# Altium PCB PCB_OSHW_BiDi_SDI_Fiber_Converter_2024-11-17.pcbdoc
Units mil, origin at the board's own origin, x right, y up, seen from the top; angles counter-clockwise.
Board outline 6239.76 x 2995 mil, 2 copper layers (Top Layer, Bottom Layer); 70 components, 44 nets, 190 pads, 66 vias.
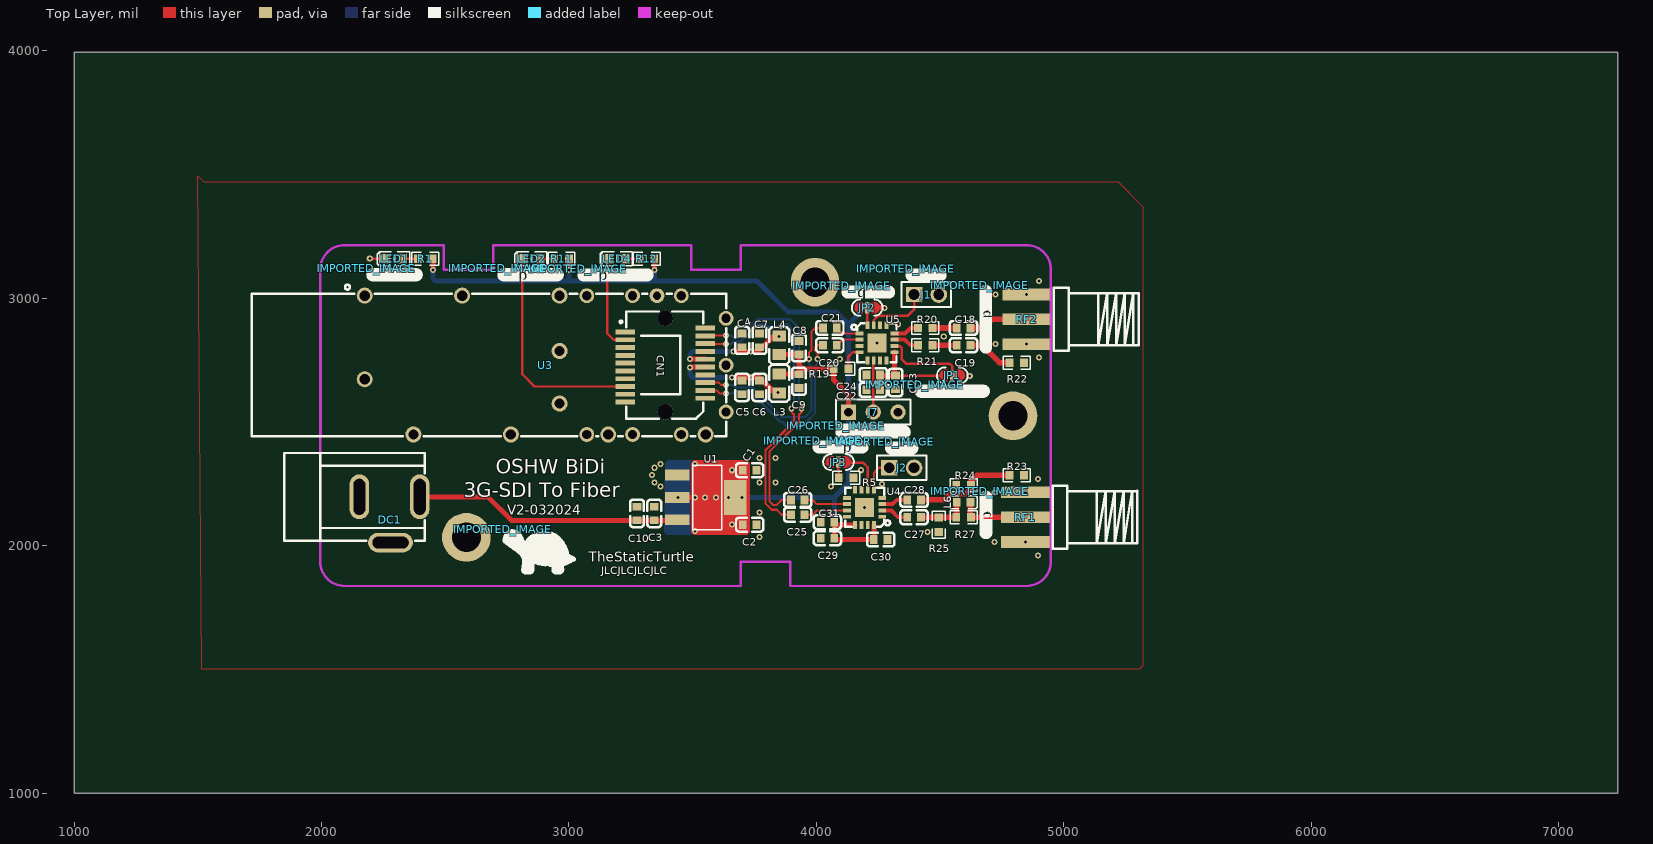
[diagram p0: Top Layer view]
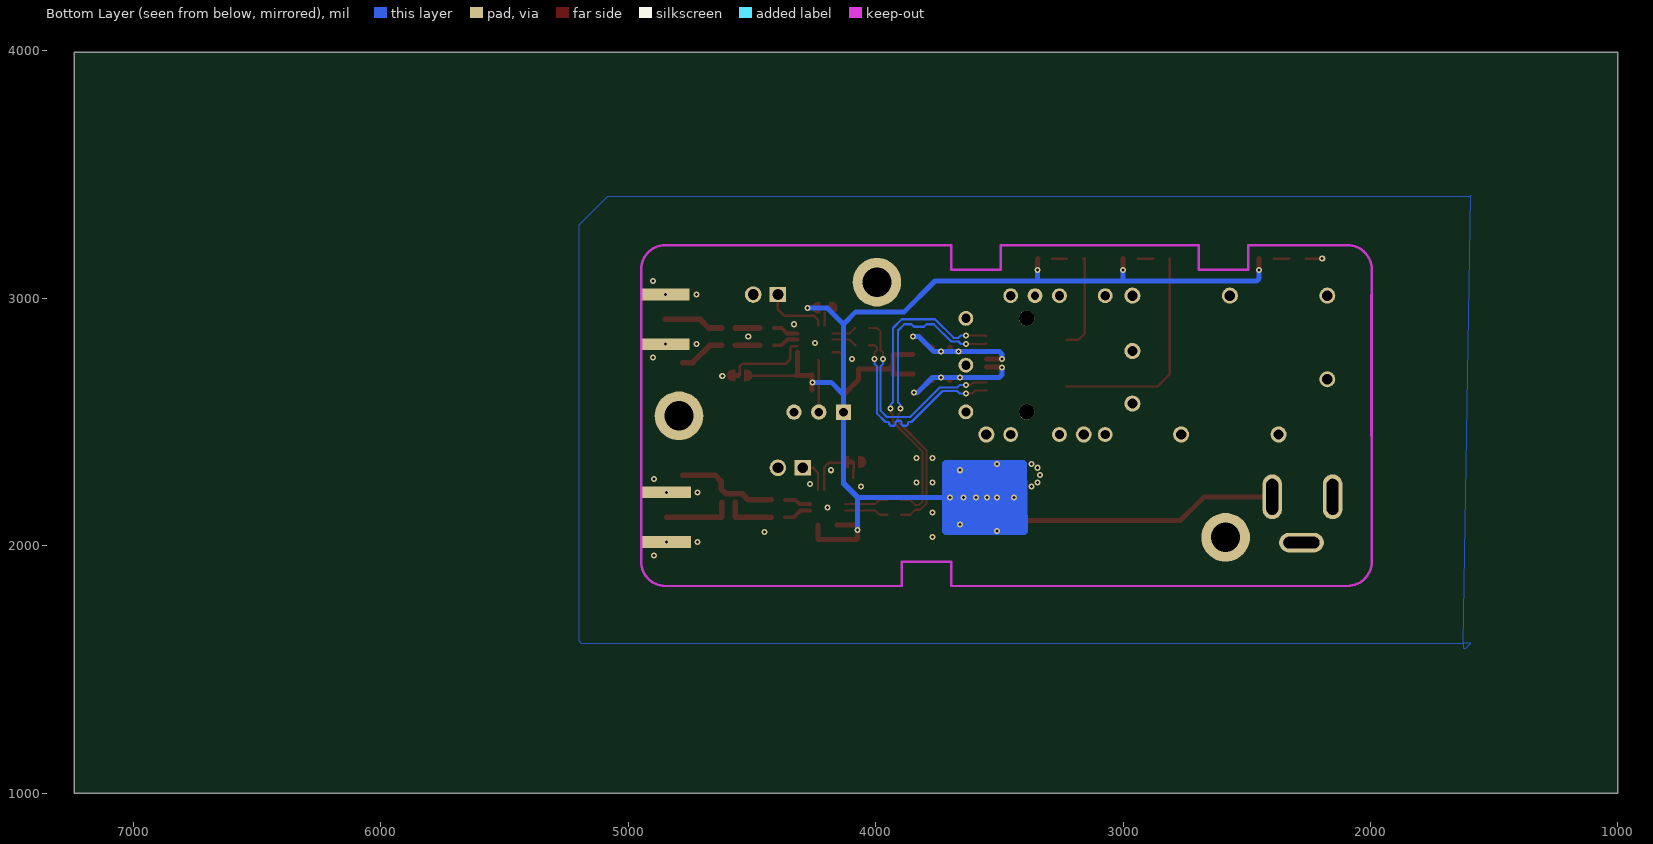
[diagram p1: Bottom Layer view, seen from below]

## Layer stack, top to bottom
Top Layer: signal copper (thickness not stored)
Dielectric: dielectric 12.6, FR-4, Dk 4.8
Bottom Layer: signal copper (thickness not stored)

## Board outline
7239.76,1000 1000,1000 1000,3995 7239.76,3995

## Components (designator, comment, footprint, x,y, rotation, side; value= is the part's Value field where it differs from the comment)
C1 "10u" C0603 3730,2305 r180 top
C2 "100n" C0603 3730,2085 r180 top
C3 "100n" C0603 3345,2130 r270 top
C4 "10u" C0603 3700,2830 r270 top
C5 "100n" C0603 3700,2640 r90 top
C6 "10u" C0603 3770,2640 r90 top
C7 "100n" C0603 3770,2830 r270 top
C8 "100n" C0603 3930,2800 r270 top
C9 "10u" C0603 3930,2665 r90 top
C10 "10u" C0603 3275,2130 r270 top
C18 "100n" C0603 4595,2880 r0 top
C19 "100n" C0603 4595,2810 r0 top
C20 "100n" C0603 4055,2810 r0 top
C21 "100n" C0603 4055,2880 r0 top
C22 "10u" C0603 4230,2630 r0 top
C23 "10n" C0603 4320,2660 r90 top
C24 "100n" C0603 4230,2690 r0 top
C25 "4.7u" C0603 3925,2125 r0 top
C26 "4.7u" C0603 3925,2185 r0 top
C27 "1u" C0603 4395,2115 r0 top
C28 "1u" C0603 4395,2185 r0 top
C29 "10n" C0603 4045,2030 r0 top
C30 "10n" C0603 4260,2025 r180 top
C31 "10u" C0603 4045,2095 r0 top
CN1 "HC-SFP-20P" CONN-SMD_20P-P0.80_HCTL_HC-SFP-20P 3390,2730 r270 top
DC1 "DC005-2.0MM" DC-IN-TH_DC005 2275,2105 r0 top
IMPORTED_IMAGE "IMPORTED_IMAGE" IMPORTED_IMAGE 4661.08,3052.84 r0 top
IMPORTED_IMAGE "IMPORTED_IMAGE" IMPORTED_IMAGE 4078.08,2485 r0 top
IMPORTED_IMAGE "IMPORTED_IMAGE" IMPORTED_IMAGE 4398.08,2650 r0 top
IMPORTED_IMAGE "IMPORTED_IMAGE" IMPORTED_IMAGE 2181.79,3120.64 r0 top
IMPORTED_IMAGE "IMPORTED_IMAGE" IMPORTED_IMAGE 2711.46,3120.64 r0 top
IMPORTED_IMAGE "IMPORTED_IMAGE" IMPORTED_IMAGE 3035.18,3120 r0 top
IMPORTED_IMAGE "IMPORTED_IMAGE" IMPORTED_IMAGE 4660,2220.64 r0 top
IMPORTED_IMAGE "IMPORTED_IMAGE" IMPORTED_IMAGE 4102.58,3050.64 r0 top
IMPORTED_IMAGE "IMPORTED_IMAGE" IMPORTED_IMAGE 4278.39,2420.64 r0 top
IMPORTED_IMAGE "IMPORTED_IMAGE" IMPORTED_IMAGE 4360.92,3120 r0 top
IMPORTED_IMAGE "IMPORTED_IMAGE" IMPORTED_IMAGE 3985.42,2425 r0 top
IMPORTED_IMAGE "IMPORTED_IMAGE" IMPORTED_IMAGE 2732.36,2065.54 r0 top
J1 "LFout" HDR-M-2.54_1X2 4445,3015 r0 top
J2 "LFin" HDR-M-2.54_1X2 4345,2315 r0 top
J7 "OUT_EN" HDR-M-2.54_1X3 4230,2540 r0 top
JP1 "SOLDER BRIDGE 3P Bridged" SOLDER_BRIDGE_3P_BRIDGED 4550,2690 r270 top
JP2 "SOLDER BRIDGE 3P Bridged" SOLDER_BRIDGE_3P_BRIDGED 4205,2960 r90 top
JP3 "SOLDER BRIDGE 3P Bridged" SOLDER_BRIDGE_3P_BRIDGED 4090,2340 r270 top
L3 "100Ω" L0805 3850,2655 r270 top
L4 "100Ω" L0805 3850,2810 r90 top
L6 "2.7n" L0603 4595,2175 r0 top
LED1 "LED_POW" LED0603_RED 2295,3160 r180 top
LED2 "LED_LOS" LED0603_RED 2850,3160 r180 top
LED4 "LED_LOS" LED0603_RED 3195,3160 r180 top
R1 "1k" R0603 2420,3160 r180 top
R5 "1k" R0603 4120,2275 r180 top
R11 "1k" R0603 2970,3160 r180 top
R12 "1k" R0603 3315,3160 r180 top
R19 "750" R0603 4100,2715 r0 top
R20 "25" R0603 4440,2880 r0 top
R21 "25" R0603 4440,2810 r0 top
R22 "75" R0603 4810,2740 r0 top
R23 "75" R0603 4810,2285 r0 top
R24 "75" R0603 4595,2245 r0 top
R25 "75" R0603 4495,2085 r90 top
R27 "75" R0603 4595,2115 r0 top
RF1 "SDI_IN" SMA-SMD_BWSMA-KE-P001 4845,2115 r180 top
RF2 "SDI_OUT" SMA-SMD_BWSMA-KE-P001 4850,2915 r180 top
U1 "AMS1117-3.3" SOT-223-3_L6.5-W3.4-P2.30-LS7.0-BR 3555,2195 r180 top
U3 "HC-SFP-01L" TH_HC-SFP-01L 2905,2730 r0 top
U4 "EQCO30R5" QFN16G-0.65-4X4MM 4195,2155 r180 top
U5 "EQCO30T5" QFN16G-0.65-4X4MM 4245,2820 r0 top
? "" ? 5292.11,2515.01 r0 top
? "" ? 5396.88,2527.5 r0 top

## Footprints (in the part's own frame and the unit in brackets; to place one, negate y for a bottom-side part, rotate by r counter-clockwise, add the part's x,y. Pads: shape width x height; smd on the part's side, far side on the other; paste and mask are expansions set on the pad)
C0603 [mm]
  rect 0.8x0.9 smd paste+0 mask+0.051: 1(-0.7,0) 2(0.7,0)
  silkscreen extent -1.41,-0.71 1.39,0.72
CONN-SMD_20P-P0.80_HCTL_HC-SFP-20P [mm]
  rect 0.5x2 smd paste+0 mask+0.051: 1(-3.4,-4.1) 2(-2.6,-4.1) 3(-1.8,-4.1) 4(-1,-4.1) 5(-0.2,-4.1) 6(0.6,-4.1) 7(1.4,-4.1) 8(2.2,-4.1) 9(3,-4.1) 10(3.8,-4.1) 11(3.4,4.1) 12(2.6,4.1) 13(1.8,4.1) 14(1,4.1) 15(0.2,4.1) 16(-0.6,4.1) 17(-1.4,4.1) 18(-2.2,4.1) 19(-3,4.1) 20(-3.8,4.1)
  round 1.6 hole 1.6 unplated paste+0: ""(-4.8,0) ""(4.8,0)
  silkscreen extent -5.5,-4.7 5.5,3.9
DC-IN-TH_DC005 [mm]
  oval 2x4.6 hole 1.2 slot 3.7 at 90 deg paste+0 mask+0.051: 1(3.1,2.35) 2(-3.1,2.35)
  oval 4.6x2 hole 1.2 slot 3.7 at 0 deg paste+0 mask+0.051: 3(0.1,-2.35)
  silkscreen extent -10.8,-2.15 3.6,6.85
HDR-M-2.54_1X2 [mm]
  rect 1.7x1.575 hole 1.1 paste+0 mask+0.051: 1(-1.27,0)
  round 1.7 hole 1.1 paste+0 mask+0.051: 2(1.27,0)
  silkscreen extent -2.54,-1.27 2.54,1.27
HDR-M-2.54_1X3 [mil]
  rect 62x62 hole 35 paste+0 mask+2: 1(-100,0)
  round 62 hole 35 paste+0 mask+2: 2(0,0) 3(100,0)
  silkscreen extent -150,-50 150,50
IMPORTED_IMAGE [mil]
  silkscreen extent 0,-276 48,0
L0603 [mm]
  rect 0.8x0.864 smd paste-100 mask+0.051: 1(-0.7,0) 2(0.7,0)
  silkscreen extent -1.42,-0.65 1.41,0.67
L0805 [mil]
  rect 44.59x54.21 smd paste-3937.01 mask+2: 1(-38.05,0) 2(38.04,0)
  silkscreen extent -77,-40 73,40
LED0603_RED [mm]
  rect 0.9x1 smd paste+0 mask+0.051: 1(-0.85,0) 2(0.85,0)
  silkscreen extent -1.54,-0.73 1.75,0.73
QFN16G-0.65-4X4MM [mil]
  rect 31.5x15.7 smd paste+0 mask+2: 1(-71,38) 2(-71,13) 3(-71,-13) 4(-71,-38) 9(71,-38) 10(71,-13) 11(71,13) 12(71,38)
  rect 15.7x31.5 smd paste+0 mask+2: 5(-38,-71) 6(-13,-71) 7(13,-71) 8(38,-71) 13(38,71) 14(13,71) 15(-13,71) 16(-38,71)
  rect 76.8x76.8 smd paste+0 mask+2: 17(0,0)
  silkscreen extent -103,-79 79,79
R0603 [mil]
  rect 31.75x34.02 smd paste-3937.01 mask+2: 1(-29.66,0) 2(29.66,0)
  silkscreen extent -55,-26 55,26
SMA-SMD_BWSMA-KE-P001 [mm]
  rect 5x1.2 smd paste+0 mask+0.051: 1(0,2.55) 2(0,-2.55) 5(0,0)
  rect 5x1.2 smd far side paste+0 mask+0.051: 3(0,-2.55) 4(0,2.55)
  silkscreen extent -11.5,-3.25 -2.79,3.25
SOLDER_BRIDGE_3P_BRIDGED [mm]
  rect 1.15x0.5 smd paste+0 mask+0.051: 2(0.049,-0.015)
  Top Layer region: 0.3,0 0.3,0.6 -0.2,0.6 -0.2,0
  Top Layer region: -0.523,0.461 0.62,0.461 0.62,0.715 0.618,0.751 0.613,0.786 0.606,0.821 0.597,0.855 0.586,0.889 0.573,0.922 0.559,0.954 0.542,0.985 0.523,1.015 0.503,1.045 0.481,1.072 0.458,1.099 0.433,1.124 0.406,1.148 0.378,1.169 0.349,1.19 0.319,1.208 0.288,1.225 0.255,1.24 0.222,1.253 0.189,1.263 0.154,1.272 0.119,1.279 0.084,1.284 0.049,1.287 0.014,1.284 -0.022,1.279 -0.056,1.272 -0.091,1.263 -0.124,1.253 -0.158,1.24 -0.19,1.225 -0.221,1.208 -0.251,1.19 -0.28,1.169 -0.308,1.148 -0.335,1.124 -0.36,1.099 -0.383,1.072 -0.405,1.045 -0.426,1.015 -0.444,0.985 -0.461,0.954 -0.476,0.922 -0.488,0.889 -0.499,0.855 -0.508,0.821 -0.515,0.786 -0.52,0.751 -0.523,0.715
  Top Layer region: 0.62,-0.491 -0.523,-0.491 -0.523,-0.745 -0.52,-0.781 -0.515,-0.816 -0.508,-0.851 -0.499,-0.885 -0.488,-0.919 -0.476,-0.952 -0.461,-0.984 -0.444,-1.015 -0.426,-1.045 -0.405,-1.075 -0.383,-1.102 -0.36,-1.129 -0.335,-1.154 -0.308,-1.178 -0.28,-1.2 -0.251,-1.22 -0.221,-1.238 -0.19,-1.255 -0.158,-1.27 -0.124,-1.283 -0.091,-1.294 -0.056,-1.302 -0.022,-1.309 0.014,-1.314 0.049,-1.317 0.084,-1.314 0.119,-1.309 0.154,-1.302 0.189,-1.294 0.222,-1.283 0.255,-1.27 0.288,-1.255 0.319,-1.238 0.349,-1.22 0.378,-1.2 0.406,-1.178 0.433,-1.154 0.458,-1.129 0.481,-1.102 0.503,-1.075 0.523,-1.045 0.542,-1.015 0.559,-0.984 0.573,-0.952 0.586,-0.919 0.597,-0.885 0.606,-0.851 0.613,-0.816 0.618,-0.781 0.62,-0.745
  silkscreen extent -0.78,-1.59 0.87,1.57
SOT-223-3_L6.5-W3.4-P2.30-LS7.0-BR [mm]
  rect 2.5x1.1 smd paste+0 mask+0.051: 1(2.97,-2.3) 2(2.97,0) 3(2.97,2.3)
  rect 2.34x3.6 smd paste+0 mask+0.051: 4(-2.97,0)
  silkscreen extent -1.57,-3.33 1.37,3.33
TH_HC-SFP-01L [mm]
  round 1.65 hole 1.05 paste+0 mask+0.05: 1(-18.55,7.125) 2(-8.55,7.125) 3(1.45,7.125) 11(16.45,-7.125) 14(6.45,-7.125) 16(-3.55,-7.125) 17(-13.55,-7.125) 18(-18.55,-1.455) 19(1.45,-3.955) 20(1.45,1.445)
  round 1.524 hole 0.95 paste+0 mask+0.05: 4(4.25,7.125) 5(8.95,7.125) 7(13.95,7.125) 8(18.55,4.795) 9(18.55,-0.005) 10(18.55,-4.805) 12(13.95,-7.125) 13(8.95,-7.125) 15(4.25,-7.125)
  round 1.524 hole 0.85 paste+0 mask+0.05: 6(11.45,7.125)
  Keep-Out Layer lines w0.254: -23.05,-7.239 -23.05,7.239
  silkscreen extent -30.15,-7.3 18.55,8.25
? [mil]

## Free pads (board coordinates)
  round 196.85 hole 118.11 paste+0 mask+2: 1(2585.55,2033.9) 1(3995,3065) 1(4795,2525)

## Via types
v1: diameter 24.41, hole 12.2, Top Layer to Bottom Layer, tented both sides, 64 vias
v2: diameter 24, hole 12, Top Layer to Bottom Layer, tented both sides, 2 vias

## Nets (pads, with @x,y where several pads share a name; then routed paths per layer and width w, separated by ;. In a path a pad name is that pad's centre, name@x,y a point inside that pad or via, vN(x,y) a via of type N, cw(c..) or ccw(c..) an arc to the next point about the centre after c; other vN are vias at no path point)
+3.3V: C1.2 C2.2 C8.2 C9.2 C22.2 C23.2 C24.2 C29.2 C30.2 C31.2 J7.1 L3.1 L4.1 R1.1 R11.1 R12.1 R19.1 U1.2 U1.4 U4.13 U4.16 U5.9 | length 6687.5
  Top Layer w10: C23.2 4513.89,2687.56 4514.41,2688.08
  Top Layer w20.16: R1.1 2449.66,3115.34 v1(2450,3115) ; R11.1 2999.66,3115.34 v1(3000,3115) ; R12.1 3345,3159.66 v1(3345,3115) ; v1(3440,2195) v1(3509.58,2195) v1(3550,2195) v1(3595,2195) v1(3645,2195) ; C2.2 3671.93,2115.51 U1.4 3671.93,2274.49 C1.2 ; L3.1 3929.52,2693.04 C9.2 C8.2 3929.52,2771.96 L4.1 ; C8.2 3930,2730 3945,2715 4070,2715 4070,2670 4130,2610 J7.1 ; C31.2 C29.2 4077.56,2025 C30.2 4233,2025.56 U4.16 ; C29.2 4072.6,2084 U4.13 ; 4240.59,2961.92 4273.08,2961.92 v1(4275,2960) ; C22.2 C24.2 4260,2687.56 C23.2 4316,2691.56 U5.9
  Bottom Layer w20.16: v1(2450,3115) 2450,3080 2460,3070 3000,3070 ; v1(3345,3115) 3345,3070 ; v1(3440,2195) v1(3645,2195) v1(3700,2195) 3735,2195 4070,2195 4130,2255 ; v1(4255,2660) 4180,2660 4130,2610 ; v1(4275,2960) 4195,2960 4130,2895 ; 3000,3070 v1(3000,3115) 3000,3070 ; 3000,3070 3345,3070 ; 3345,3070 3760,3070 3885,2945 4080,2945 4130,2895 ; 4130,2255 J7.1 4130,2250 4072.6,2192.6 v1(4072.56,2063.78) 4072.6,2197.6 4130,2255 ; 4130,2255 4130,2610 ; 4130,2610 4130,2895
  other v1: 3510,2060 3660,2085 3660,2305 3510,2330
+5V: C3.2 C10.2 DC1.1 U1.3 | length 1081.3
  Top Layer w20.16: DC1.1 2672.49,2197.51 2767.56,2102.44 C10.2 3436.07,2102.44 U1.3@3438.08,2104.45
GND: C1.1 C2.1 C3.1 C4.1 C5.1 C6.1 C7.1 C8.1 C9.1 C10.1 C22.1 C23.1 C24.1 C29.1 C30.1 C31.1 CN1.1 CN1.10 CN1.11 CN1.14 CN1.17 CN1.20 DC1.2 DC1.3 J1.2 J2.2 J7.3 LED1.2 pad.1 R5.1 R22.2 R23.2 R24.1 R25.1 RF1.1 RF1.2 RF1.3 RF1.4 RF2.1 RF2.2 RF2.3 RF2.4 U1.1 U3.1 U3.2 U3.3 U3.4 U3.5 U3.6 U3.7 U3.8 U3.9 U3.10 U3.11 U3.12 U3.13 U3.14 U3.15 U3.16 U3.17 U3.18 U3.19 U3.20 U4.1 U4.4 U4.9 U4.12 U4.17 U5.3 U5.17 | length 66.5
  Top Layer w10: v1(2195,3160) LED1.2
  other v1: 4895,1960 4720,2015 4845,2014.61 3770,2035 4450,2055 3770,2135 4195,2155 4720,2215 4845,2215.4 3370,2240 4060,2240 4265,2250 3345,2255 3770,2255 3835,2255 4895,2269.99 3335,2285 4180,2305 3345,2315 3370,2330 3770,2355 3835,2355 4620,2685 4095,2755 4900,2760 4725,2815 4850,2814.61 4245,2820 4515,2845 4330,2895 4725,3015 4850,3015.4 4900,3069.99
JP3_2: JP3.2 R5.2 | length 63.1
  Top Layer w10: JP3.2 R5.2@4090,2275
LED4_1: LED4.1 R12.2 | length 56.9
  Top Layer w10: LED4.1 R12.2
LFIN: J2.1 U4.5 | length 139.3
  Top Layer w10: U4.5 4233,2295 4253,2315 J2.1
LFOUT: J1.1 U5.15 | length 261.8
  Top Layer w10: U5.15 4232,2912 4248.5,2928.5 4368.5,2928.5 4395,2955 J1.1
OUT_EQDIS: JP2.2 U5.16 | length 50.6
  Top Layer w10: JP2.2@4205.59,2941.04 4205.59,2892.41 U5.16
OUT_SD_HD: JP1.2 U5.10 | length 331
  Top Layer w10: U5.10 4338,2807 4345,2800 4345,2755 4365,2735 4540,2735 4549.4,2725.6 JP1.2
R1_2: LED1.1 R1.2 | length 61.9
  Top Layer w10: LED1.1 R1.2
R11_2: LED2.1 R11.2 | length 61.9
  Top Layer w10: LED2.1@2878.47,3160 R11.2
RF1_5: L6.2 R27.2 RF1.5 | length 281.2
  Top Layer w22.84: L6.2 4622.56,2117.11 R27.2 ; R27.2 RF1.5
S$29966: 
SDI_IN_N: C28.2 R23.1 R24.2 | length 416.7
  Top Layer w22.84: C28.2 4515,2185 4540,2210 4605,2210 4624.7,2229.7 R24.2 4624.7,2259.7 4650,2285 R23.1
SDI_IN_P: C27.2 L6.1 R25.2 R27.1 | length 203.6
  Top Layer w22.84: C27.2 R25.2 R27.1 ; R27.1 4567.44,2117.11 L6.1
SDI_INA_N: C28.1 U4.3 | length 108.5
  Top Layer w15.75: U4.3 4308,2168 4325,2185 C28.1
SDI_INA_P: C27.1 U4.2 | length 112.6
  Top Layer w15.75: U4.2 4303,2142 4330,2115 C27.1
SDI_OUT_N: C19.2 R22.1 | length 186.8
  Top Layer w22.84: C19.2 4670,2810 4740,2740 R22.1
SDI_OUT_P: C18.2 RF2.5 | length 241.9
  Top Layer w22.84: C18.2 4675,2880 4710.01,2915.01 RF2.5
SDI_OUTA_N: R21.1 U5.11 | length 103.8
  Top Layer w15.75: U5.11 4357,2833 4380,2810 R21.1
SDI_OUTA_P: R20.1 U5.12 | length 103.5
  Top Layer w15.75: U5.12 4358,2858 4380,2880 R20.1
SDI_OUTB_N: C19.1 R21.2 | length 97.8
  Top Layer w22.84: R21.2 C19.1
SDI_OUTB_P: C18.1 R20.2 | length 97.8
  Top Layer w22.84: R20.2 C18.1
SFP_IN_N: C26.2 U4.10 | length 178.4
  Top Layer w8.66: C26.2 3985,2185 4002,2168 U4.10
SFP_IN_P: C25.2 U4.11 | length 178.5
  Top Layer w8.66: C25.2 3985,2125 4002,2142 U4.11
SFP_MOD_DEF0: CN1.6
SFP_OUT_N: C20.2 U5.2 | length 101
  Top Layer w8.66: C20.2 4105.56,2833 U5.2
SFP_OUT_P: C21.2 U5.1 | length 100.6
  Top Layer w8.66: C21.2 4104.56,2858 U5.1
SFP_RATE_SELECT0: CN1.7
SFP_RATE_SELECT1: CN1.9
SFP_RD+: C21.1 CN1.13 | length 878.5
  Top Layer w8.66: CN1.13 3605.9,2659.1 3615,2650 v1(3635,2650) ; v1(3970,2755) 3970,2780 3980,2790 3980,2865 3995,2880 C21.1
  Bottom Layer w8.66: v1(3635,2650) 3660,2650 3670,2640 3740,2640 3860,2520 3955,2520 3980,2545 3980,2725 3970,2735 v1(3970,2755)
SFP_RD-: C20.1 CN1.12 | length 875.7
  Top Layer w8.66: CN1.12 3597.4,2627.6 3610,2615 v1(3635,2615) ; v1(4005,2755) 4005,2780 3995,2790 3995,2800 4005,2810 C20.1
  Bottom Layer w8.66: v1(3635,2615) 3660,2615 3670,2625 3730,2625 3855,2500 3865,2500 3870,2495 3870,2490 3875,2485 3890,2485 3895,2490 3895,2500 3900,2505 3915,2505 3920,2500 3920,2490 3925,2485 3940,2485 3945,2490 3945,2495 3950,2500 3960,2500 3995,2535 3995,2725 4005,2735 v1(4005,2755)
SFP_RX_LOS: CN1.8 LED2.2 | length 904.3
  Top Layer w10: LED2.2@2811.54,3160 2811.54,2693.46 2861.61,2643.39 CN1.8
SFP_SCL: CN1.5
SFP_SDA: CN1.4
SFP_TD+: C25.1 CN1.18 | length 1288
  Top Layer w8.66: CN1.18 3553.03,2815 v1(3635,2815) ; C25.1 3860,2125 3840,2145 3820,2145 3795,2170 3795,2387 3910,2502 3910,2530 3900,2540 v2(3900,2555)
  Bottom Layer w8.66: v1(3635,2815) 3655,2815 3665,2825 3695,2825 3765,2895 3795,2895 3805,2885 3845,2885 3855,2895 3885,2895 3910,2870 3910,2580 3900,2570 v2(3900,2555)
SFP_TD-: C26.1 CN1.19 | length 1289
  Top Layer w8.66: CN1.19 3556.41,2848.11 3558.3,2850 v1(3635,2850) ; C26.1 3860,2185 3840,2165 3825,2165 3810,2180 3810,2380 3930,2500 3930,2530 3940,2540 v2(3940,2555)
  Bottom Layer w8.66: v1(3635,2850) 3655,2850 3665,2840 3685,2840 3760,2915 3895,2915 3930,2880 3930,2580 3940,2570 v2(3940,2555)
SFP_TX_DISABLE: CN1.3
SFP_TX_FAULT: CN1.2 LED4.2 | length 392.6
  Top Layer w10: LED4.2 3155,3160 3155,2858.1 3180.7,2832.4 CN1.2
U4_6: U4.6 | length 182.9
  Top Layer w10: 4124.7,2337.8 4127.5,2335 4190,2335 4208,2317 U4.6
U5_4: R19.2 U5.4 | length 101.2
  Top Layer w10: R19.2 4129.66,2764.66 4147,2782 U5.4
U5_6: J7.2 U5.6 | length 209.8
  Top Layer w10: J7.2 4230,2747 U5.6
VCC_SFPR: C5.2 C6.2 CN1.15 L3.2 | length 833.5
  Top Layer w20.16: v1(3490,2720) 3492.13,2722.13 CN1.15 ; v1(3660,2680) v1(3735,2680) ; C5.2 3712.44,2680 v1(3735,2680) ; C6.2 3782.44,2667.56 3830,2620 v1(3845,2620) 3848.04,2616.96 L3.2 ; L3.2 3833,2617 3770,2680 v1(3735,2680)
  Bottom Layer w20.16: v1(3490,2720) 3490,2690 3500,2680 v1(3660,2680) 3770,2680 3830,2620 v1(3845,2620)
VCC_SFPT: C4.2 C7.2 CN1.16 L4.2 | length 807.4
  Top Layer w20.16: v1(3490,2755) 3491.38,2753.62 3505,2753.62 CN1.16 ; v1(3665,2785) 3695,2785 C4.2@3700,2790 ; C7.2 3782.44,2802.44 L4.2@3825,2845 ; C4.2@3700,2790 3705,2785 v1(3735,2785) 3765,2785 L4.2@3825,2845 ; C4.2@3700,2790 C4.2 C4.2@3700,2790 ; L4.2@3825,2845 v1(3850,2845) L4.2@3825,2845
  Bottom Layer w20.16: v1(3490,2755) 3490,2775 3500,2785 3765,2785 3825,2845 v1(3850,2845)
pads on no net: CN1. U4.7 U4.8 U4.14 U4.15 U5.5 U5.7 U5.8 U5.13 U5.14

## Polygon pours and split planes (outlines as drawn)
GND on Bottom Layer (solid): 1624.67,1605 1625,1585 1615,1585 1595,1605 1624.67,1605
GND on Bottom Layer (solid): 1624.67,1605 1595,3415 1600,3410 5085,3410 5200,3295 5200,1615 5190,1605 1624.67,1605
GND on Top Layer (solid): 1500,3495 1525,3470 5220,3470 5320,3370 5320,1515 5305,1500 1515,1500

## Keep-outs
Keep-Out Layer:
  lines w10: 1995,1935.47 ccw(c2093.43,1935.47) 2093.43,1837.05 ; 1995,3116.57 cw(c2093.43,3116.57) 2093.43,3215 ; 4849.32,1837.05 ccw(c4849.32,1935.47) 4947.75,1935.47 ; 4849.32,3215 cw(c4849.32,3116.57) 4947.75,3116.57

## Other copper
Top Layer:
  region net +3.3V: 3730,2335 3720,2345 3505,2345 3495,2335 3495,2055 3505,2045 3720,2045 3730,2055
Bottom Layer:
  region net +3.3V: 3730,2335 3720,2345 3400,2345 3390,2335 3385,2055 3395,2045 3720,2045 3730,2055

## Silkscreen, mask and mechanical layers (free items; w line width, h text height)
Top Overlay:
  text "OSHW BiDi" at 2705,2290.47 h59.05
  text "3G-SDI To Fiber" at 2575,2195.47 h59.05
  text "V2-032024" at 2750,2125.32 h39.37
  text "TheStaticTurtle" at 3080,1935.32 h39.37
  text "JLCJLCJLCJLC" at 3130,1884.25 h31.5